# EAGLE board SunnyBuddy-Panel-v13 (EAGLE 6.6.0), part 1 of 2
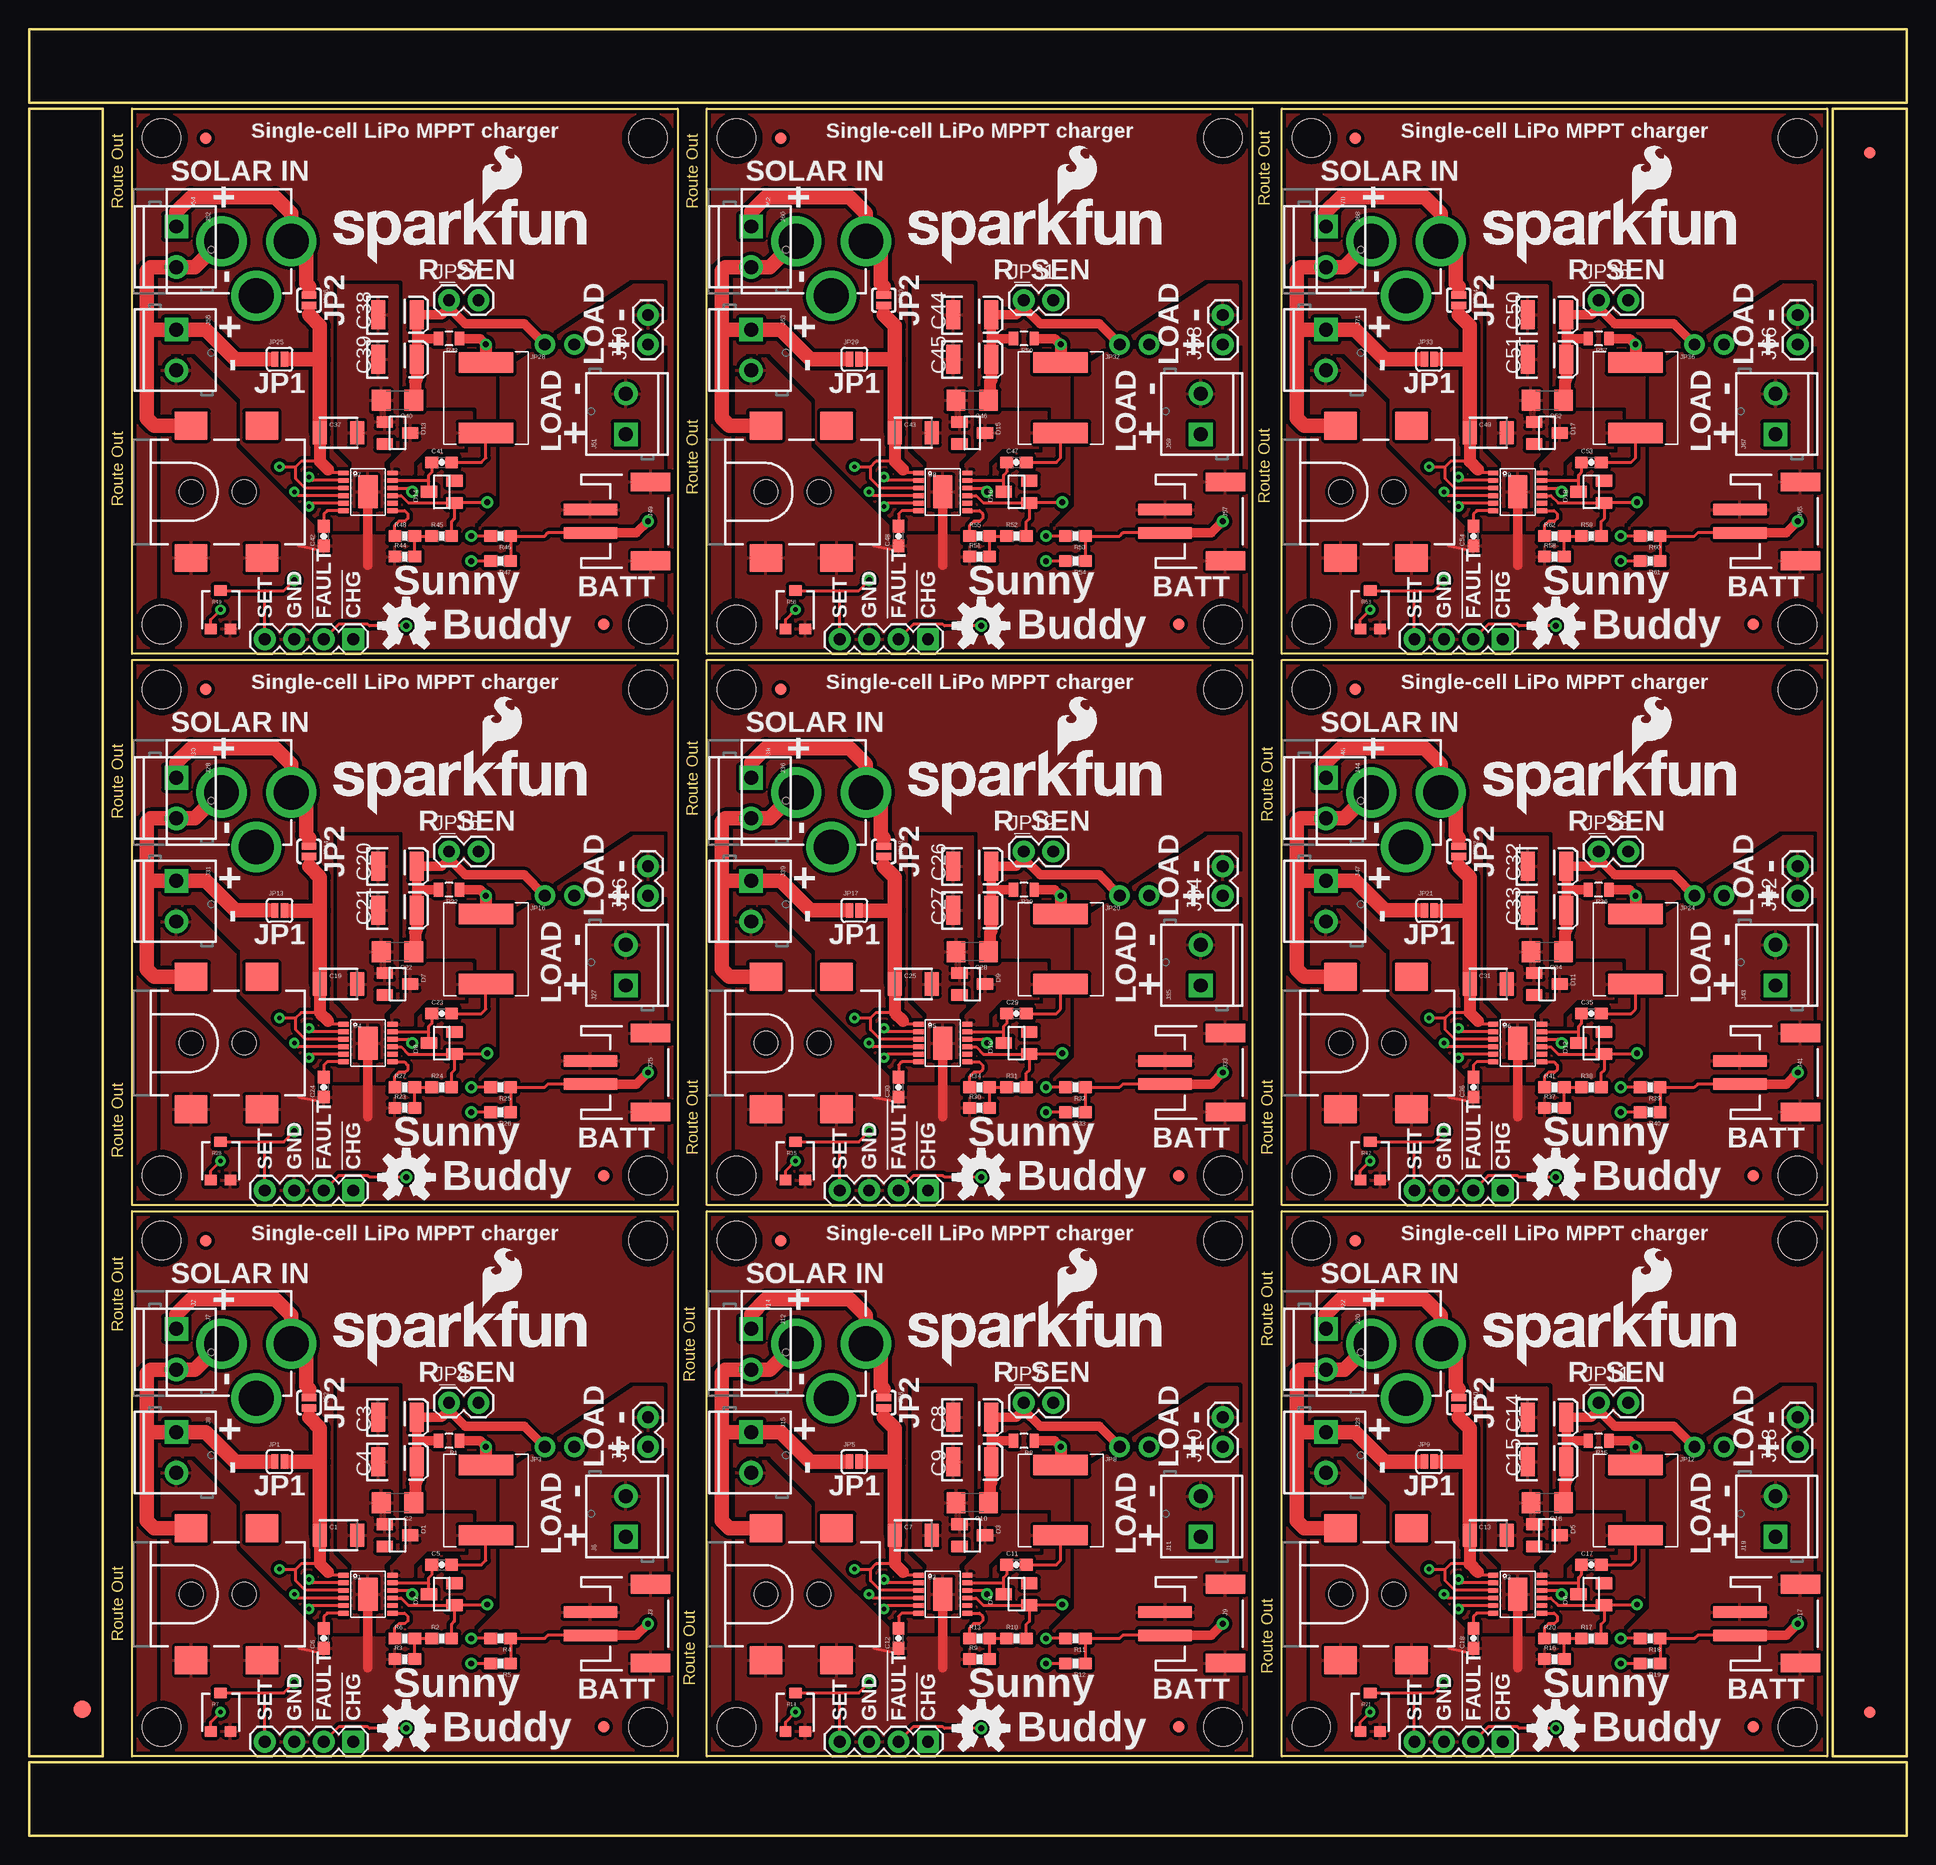
[diagram p0: board, top side]
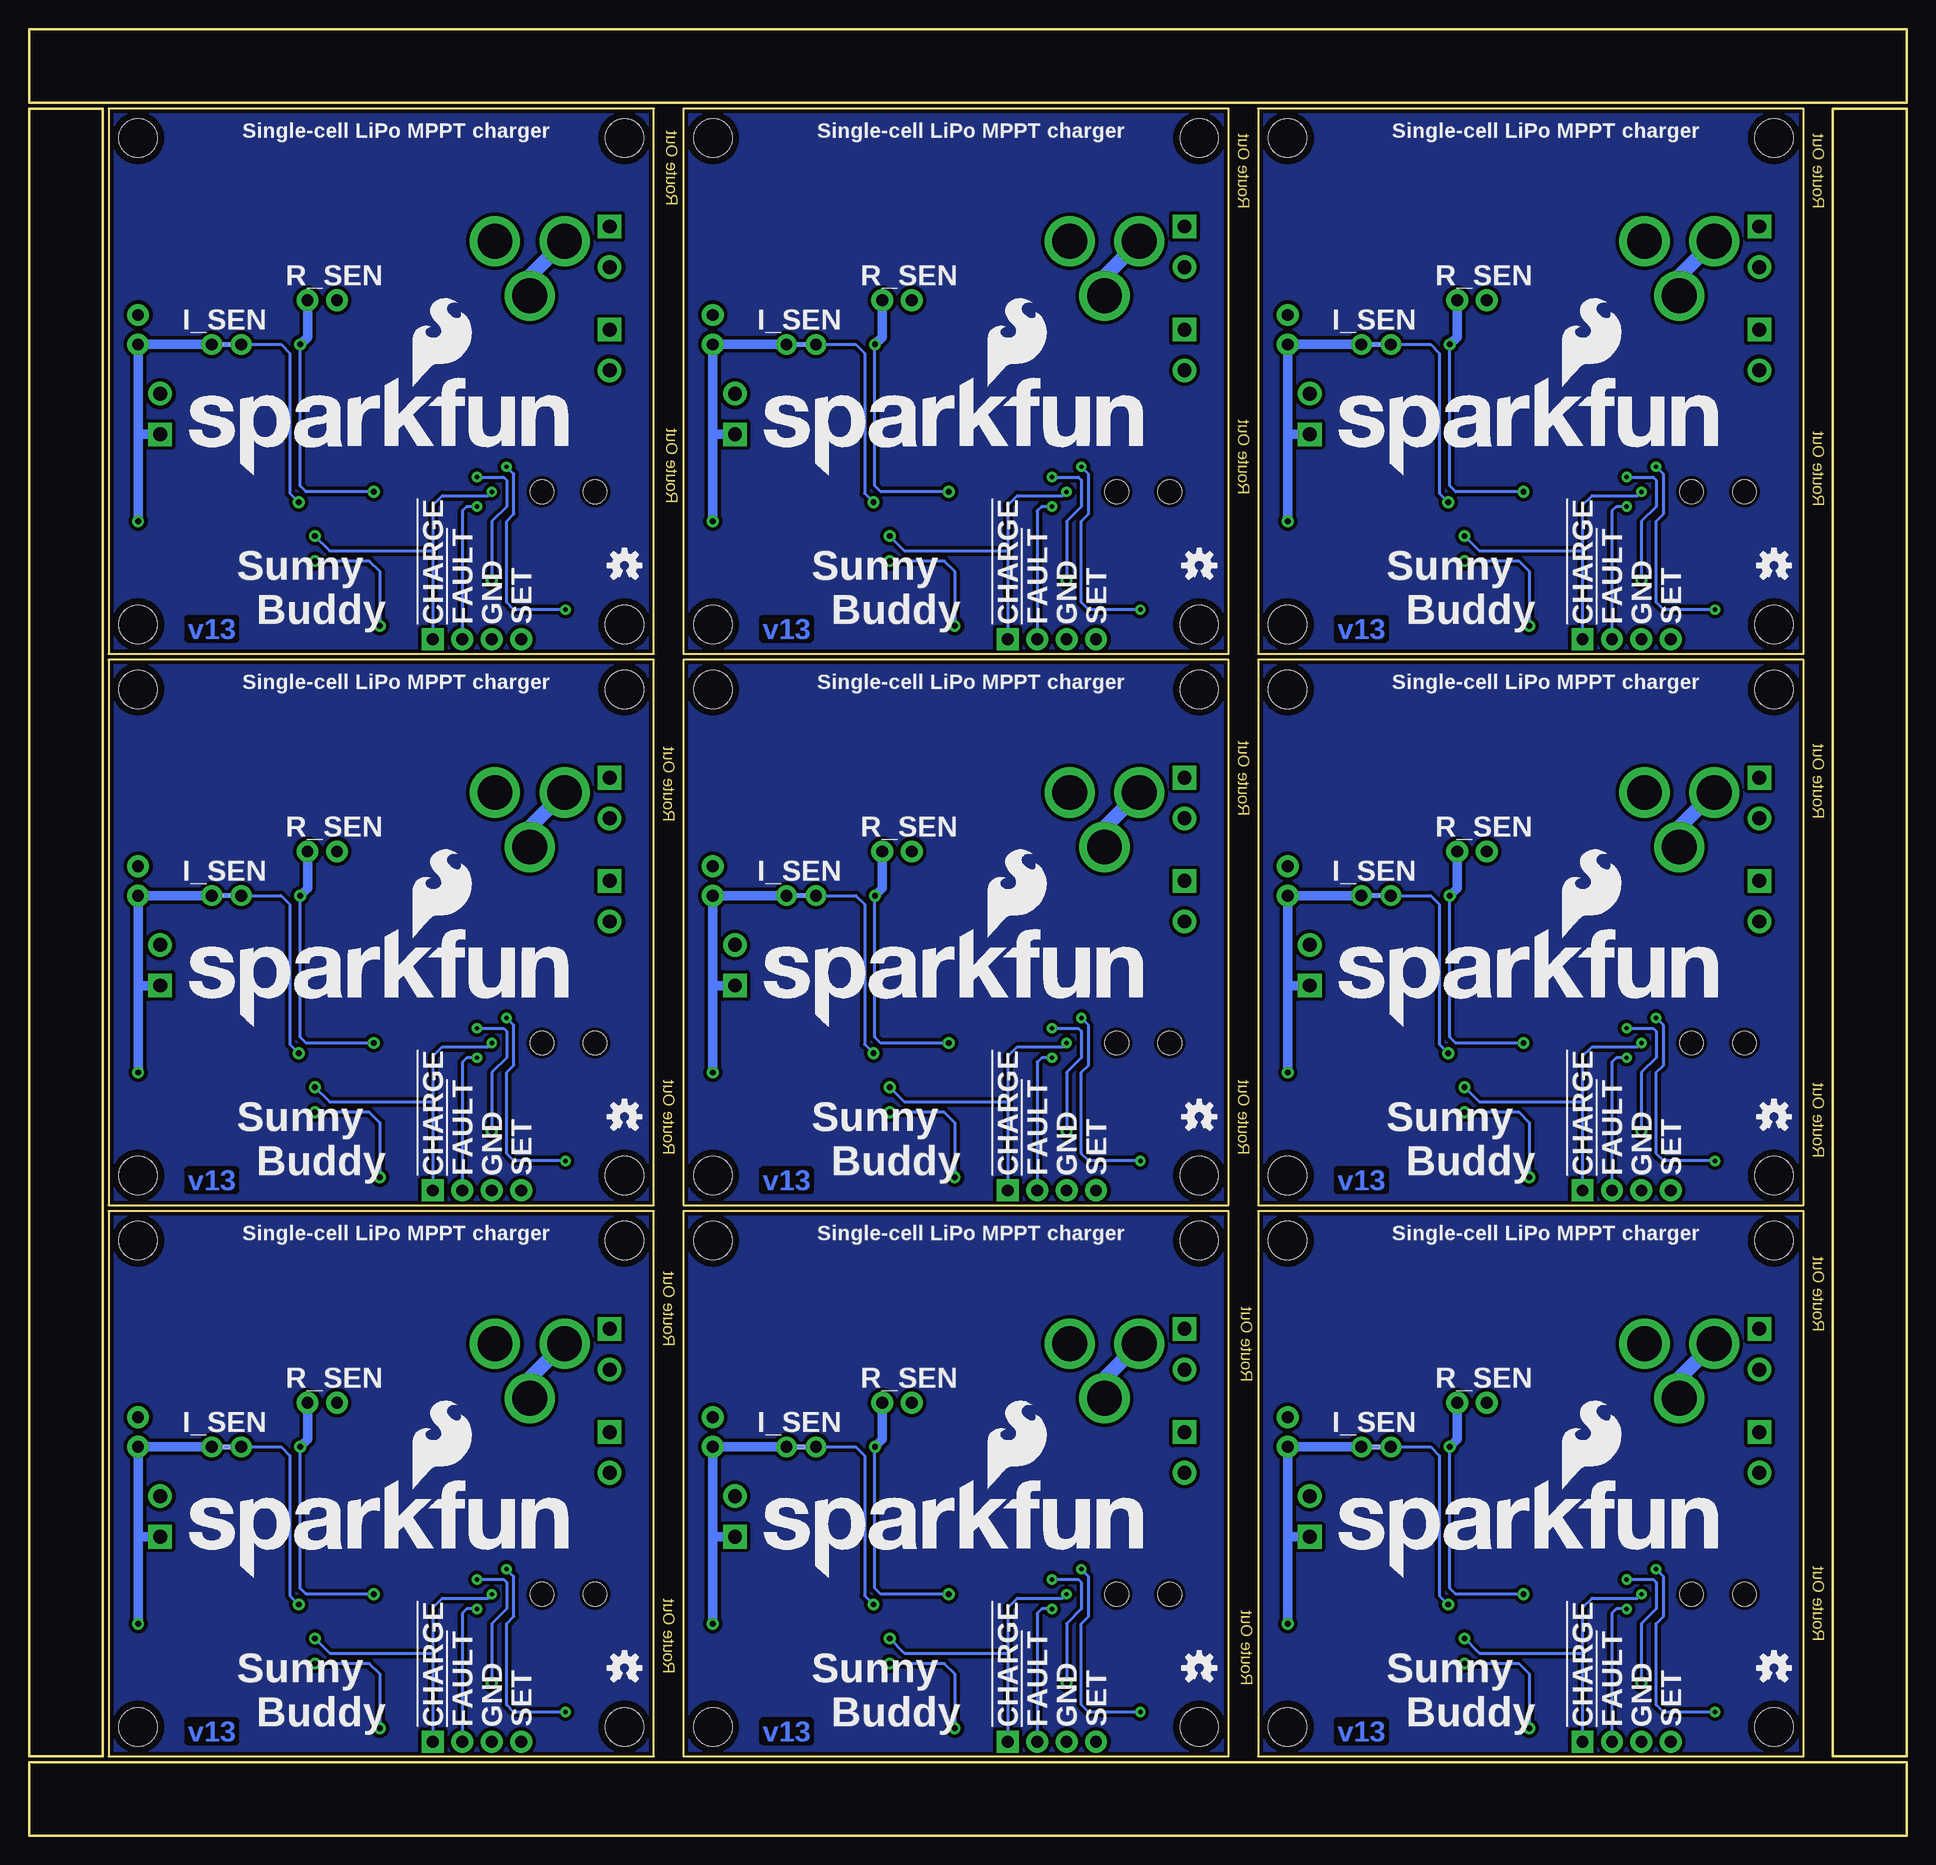
[diagram p1: board, bottom side, seen from below]

Size 161.8 x 155.7 mm. Coordinates in mm from the lower left corner, seen from the top.
Outline: 8.89,53.85 55.88,53.85 55.88,6.86 8.89,6.86 8.89,53.85
Outline: 58.42,53.85 105.41,53.85 105.41,6.86 58.42,6.86 58.42,53.85
Outline: 107.95,53.85 154.94,53.85 154.94,6.86 107.95,6.86 107.95,53.85
Outline: 8.89,101.35 55.88,101.35 55.88,54.36 8.89,54.36 8.89,101.35
Outline: 58.42,101.35 105.41,101.35 105.41,54.36 58.42,54.36 58.42,101.35
Outline: 107.95,101.35 154.94,101.35 154.94,54.36 107.95,54.36 107.95,101.35
Outline: 8.89,148.84 55.88,148.84 55.88,101.85 8.89,101.85 8.89,148.84
Outline: 58.42,148.84 105.41,148.84 105.41,101.85 58.42,101.85 58.42,148.84
Outline: 107.95,148.84 154.94,148.84 154.94,101.85 107.95,101.85 107.95,148.84
Outline: 6.35,6.86 6.35,148.84 0,148.84 0,6.86 6.35,6.86
Outline: 0,6.35 0,0 161.8,0 161.8,6.35 0,6.35
Outline: 161.8,6.86 161.8,148.84 155.45,148.84 155.45,6.86 161.8,6.86
Outline: 161.8,149.35 161.8,155.7 0,155.7 0,149.35 161.8,149.35
Copper layers (1*16): Top 0.035mm / dielectric 1.5mm / Bottom 0.035mm
Design rules "Sparkfun": minimum track width 8mil, minimum drill 20mil, track to track 8mil, track to pad 8mil, pad to pad 8mil, via to via 8mil, smd to smd 8mil, copper to edge 8mil, drill to drill 8mil, minimum pad ring 12mil, minimum via ring 10mil, stop-mask expansion 4mil, vias tented up to drill 20mil, thermal gap 10mil

## Footprints (pad centres in the part's own frame; a part is rotated, then mirrored left to right if it is on the bottom)
1210 = smd 1.2 x 2: 1 -1.6,0; 2 1.6,0
1206 = smd 1.6 x 1.8: 1 -1.4,0; 2 1.4,0
EIA3528 = smd 1.2 x 2.5: A 1.65,0; C -1.65,0
0603-CAP = smd 1.1 x 1: 1 -0.85,0; 2 0.85,0
SOT23 = smd 1 x 1.4: 1 -0.95,-1.1; 2 0.95,-1.1; 3 0,1.1
FIDUCIAL-1.5X3 = smd 1.5 x 1.5: 1 0,0
FIDUCIAL-1X2 = smd 1 x 1: 1 0,0
POWER_JACK_SMD = smd 2.8 x 2.4: GND 0,-5.7; P$4 6.1,-5.7; VIN0 0,5.7; VIN1 6.1,5.7 | hole 2.032: 0,0; 4.572,0
POWER_JACK_PTH = drill 2.997 pad 4.318: GND 0,7.7; GNDBREAK 4.7,10.7; PWR 0,13.7
JST-2-SMD = smd 1 x 4.6: 1 -1,-3.7; 2 1,-3.7 | smd 1.6 x 3.4: NC1 -3.4,1.5; NC2 3.4,1.5
1X04 = drill 1.016 pad 1.88 square: 1 0,0 | drill 1.016 pad 1.88: 2 2.54,0; 3 5.08,0; 4 7.62,0
1X02 = drill 1.016 pad 1.88: 1 0,0; 2 2.54,0
SCREWTERMINAL-3.5MM-2 = drill 1.2 pad 2.032 square: 1 0,0 | drill 1.2 pad 2.032: 2 3.5,0
SJ_2S = smd 0.635 x 1.27: 1 -0.412,0; 2 0.412,0
SJ_2S-NO = smd 0.635 x 1.27: 1 -0.45,0; 2 0.45,0
PTH-JUMPER-NC_BOTTOM_NO_SILK = drill 1.016 pad 1.778: 1 -1.27,0; 2 1.27,0 | smd 1.27 x 0.381 bottom: P$1 0,0
CR75 = smd 1.75 x 4.7: P$1 0,0; P$2 6.05,0
0805 = smd 0.8 x 1.2: 1 -0.9,0; 2 0.9,0
0603-RES = smd 1.1 x 1: 1 -0.85,0; 2 0.85,0
TRIMPOT-3MM = smd 1 x 0.9: 1 -0.85,-1.65; 3 0.85,-1.65 | smd 1.1 x 0.9: 2 0,1.65
STAND-OFF = hole 3.302: 0,0
MSOP-12_GND = smd 0.889 x 0.42: 1 -2.1,1.625; 2 -2.1,0.975; 3 -2.1,0.325; 4 -2.1,-0.325; 5 -2.1,-0.975; 6 -2.1,-1.625; 7 2.1,-1.625; 8 2.1,-0.975; 9 2.1,-0.325; 10 2.1,0.325; 11 2.1,0.975; 12 2.1,1.625 | smd 1.651 x 2.845: 13 0,0

## Placement (x,y rotation side)
C1  10uF  [1210]  26.67,25.91 0 top
C2  10uF  [1206]  31.75,28.7 180 top
C3  47uF  [EIA3528]  31.75,36.07 0 top
C4  47uF  [EIA3528]  31.75,32.26 0 top
C5  1.0uF  [0603-CAP]  35.56,23.37 0 top
C6  1.0uF  [0603-CAP]  25.4,17.02 90 top
C7  10uF  [1210]  76.2,25.91 0 top
C8  47uF  [EIA3528]  81.28,36.07 0 top
C9  47uF  [EIA3528]  81.28,32.26 0 top
C10  10uF  [1206]  81.28,28.7 180 top
C11  1.0uF  [0603-CAP]  85.09,23.37 0 top
C12  1.0uF  [0603-CAP]  74.93,17.02 90 top
C13  10uF  [1210]  125.73,25.91 0 top
C14  47uF  [EIA3528]  130.81,36.07 0 top
C15  47uF  [EIA3528]  130.81,32.26 0 top
C16  10uF  [1206]  130.81,28.7 180 top
C17  1.0uF  [0603-CAP]  134.62,23.37 0 top
C18  1.0uF  [0603-CAP]  124.46,17.02 90 top
C19  10uF  [1210]  26.67,73.41 0 top
C20  47uF  [EIA3528]  31.75,83.57 0 top
C21  47uF  [EIA3528]  31.75,79.76 0 top
C22  10uF  [1206]  31.75,76.2 180 top
C23  1.0uF  [0603-CAP]  35.56,70.87 0 top
C24  1.0uF  [0603-CAP]  25.4,64.52 90 top
C25  10uF  [1210]  76.2,73.41 0 top
C26  47uF  [EIA3528]  81.28,83.57 0 top
C27  47uF  [EIA3528]  81.28,79.76 0 top
C28  10uF  [1206]  81.28,76.2 180 top
C29  1.0uF  [0603-CAP]  85.09,70.87 0 top
C30  1.0uF  [0603-CAP]  74.93,64.52 90 top
C31  10uF  [1210]  125.73,73.41 0 top
C32  47uF  [EIA3528]  130.81,83.57 0 top
C33  47uF  [EIA3528]  130.81,79.76 0 top
C34  10uF  [1206]  130.81,76.2 180 top
C35  1.0uF  [0603-CAP]  134.62,70.87 0 top
C36  1.0uF  [0603-CAP]  124.46,64.52 90 top
C37  10uF  [1210]  26.67,120.9 0 top
C38  47uF  [EIA3528]  31.75,131.06 0 top
C39  47uF  [EIA3528]  31.75,127.25 0 top
C40  10uF  [1206]  31.75,123.7 180 top
C41  1.0uF  [0603-CAP]  35.56,118.36 0 top
C42  1.0uF  [0603-CAP]  25.4,112.01 90 top
C43  10uF  [1210]  76.2,120.9 0 top
C44  47uF  [EIA3528]  81.28,131.06 0 top
C45  47uF  [EIA3528]  81.28,127.25 0 top
C46  10uF  [1206]  81.28,123.7 180 top
C47  1.0uF  [0603-CAP]  85.09,118.36 0 top
C48  1.0uF  [0603-CAP]  74.93,112.01 90 top
C49  10uF  [1210]  125.73,120.9 0 top
C50  47uF  [EIA3528]  130.81,131.06 0 top
C51  47uF  [EIA3528]  130.81,127.25 0 top
C52  10uF  [1206]  130.81,123.7 180 top
C53  1.0uF  [0603-CAP]  134.62,118.36 0 top
C54  1.0uF  [0603-CAP]  124.46,112.01 90 top
D1  ZLLS500  [SOT23]  31.75,25.91 270 top
D2  ZLLS500  [SOT23]  35.56,20.83 90 top
D3  ZLLS500  [SOT23]  81.28,25.91 270 top
D4  ZLLS500  [SOT23]  85.09,20.83 90 top
D5  ZLLS500  [SOT23]  130.81,25.91 270 top
D6  ZLLS500  [SOT23]  134.62,20.83 90 top
D7  ZLLS500  [SOT23]  31.75,73.41 270 top
D8  ZLLS500  [SOT23]  35.56,68.33 90 top
D9  ZLLS500  [SOT23]  81.28,73.41 270 top
D10  ZLLS500  [SOT23]  85.09,68.33 90 top
D11  ZLLS500  [SOT23]  130.81,73.41 270 top
D12  ZLLS500  [SOT23]  134.62,68.33 90 top
D13  ZLLS500  [SOT23]  31.75,120.9 270 top
D14  ZLLS500  [SOT23]  35.56,115.82 90 top
D15  ZLLS500  [SOT23]  81.28,120.9 270 top
D16  ZLLS500  [SOT23]  85.09,115.82 90 top
D17  ZLLS500  [SOT23]  130.81,120.9 270 top
D18  ZLLS500  [SOT23]  134.62,115.82 90 top
E$1  [FIDUCIAL-1.5X3]  4.57,10.92 0 top
E$4  [FIDUCIAL-1X2]  158.62,10.67 0 top
E$6  [FIDUCIAL-1X2]  158.62,145.03 180 top
FID1  FIDUCIAL1X2  [FIDUCIAL-1X2]  15.24,51.31 0 top
FID2  FIDUCIAL1X2  [FIDUCIAL-1X2]  49.53,9.4 0 top
FID3  FIDUCIAL1X2  [FIDUCIAL-1X2]  64.77,51.31 0 top
FID4  FIDUCIAL1X2  [FIDUCIAL-1X2]  99.06,9.4 0 top
FID5  FIDUCIAL1X2  [FIDUCIAL-1X2]  114.3,51.31 0 top
FID6  FIDUCIAL1X2  [FIDUCIAL-1X2]  148.59,9.4 0 top
FID7  FIDUCIAL1X2  [FIDUCIAL-1X2]  15.24,98.81 0 top
FID8  FIDUCIAL1X2  [FIDUCIAL-1X2]  49.53,56.9 0 top
FID9  FIDUCIAL1X2  [FIDUCIAL-1X2]  64.77,98.81 0 top
FID10  FIDUCIAL1X2  [FIDUCIAL-1X2]  99.06,56.9 0 top
FID11  FIDUCIAL1X2  [FIDUCIAL-1X2]  114.3,98.81 0 top
FID12  FIDUCIAL1X2  [FIDUCIAL-1X2]  148.59,56.9 0 top
FID13  FIDUCIAL1X2  [FIDUCIAL-1X2]  15.24,146.3 0 top
FID14  FIDUCIAL1X2  [FIDUCIAL-1X2]  49.53,104.39 0 top
FID15  FIDUCIAL1X2  [FIDUCIAL-1X2]  64.77,146.3 0 top
FID16  FIDUCIAL1X2  [FIDUCIAL-1X2]  99.06,104.39 0 top
FID17  FIDUCIAL1X2  [FIDUCIAL-1X2]  114.3,146.3 0 top
FID18  FIDUCIAL1X2  [FIDUCIAL-1X2]  148.59,104.39 0 top
J1  5.5x2.1mm Barrel  [POWER_JACK_SMD]  13.97,20.83 0 top
J2  POWER_JACKPTH  [POWER_JACK_PTH]  8.89,42.42 270 top
J3  [JST-2-SMD]  52.07,18.29 270 top
J4  [1X04]  27.94,8.13 180 top
J5  M02PTH  [1X02]  53.34,33.53 90 top
J6  M023.5MM  [SCREWTERMINAL-3.5MM-2]  51.44,25.78 90 top
J7  M023.5MM  [SCREWTERMINAL-3.5MM-2]  12.7,43.69 270 top
J8  M023.5MM  [SCREWTERMINAL-3.5MM-2]  12.7,34.8 270 top
J9  [JST-2-SMD]  101.6,18.29 270 top
J10  M02PTH  [1X02]  102.87,33.53 90 top
J11  M023.5MM  [SCREWTERMINAL-3.5MM-2]  100.97,25.78 90 top
J12  M023.5MM  [SCREWTERMINAL-3.5MM-2]  62.23,43.69 270 top
J13  5.5x2.1mm Barrel  [POWER_JACK_SMD]  63.5,20.83 0 top
J14  POWER_JACKPTH  [POWER_JACK_PTH]  58.42,42.42 270 top
J15  M023.5MM  [SCREWTERMINAL-3.5MM-2]  62.23,34.8 270 top
J16  [1X04]  77.47,8.13 180 top
J17  [JST-2-SMD]  151.13,18.29 270 top
J18  M02PTH  [1X02]  152.4,33.53 90 top
J19  M023.5MM  [SCREWTERMINAL-3.5MM-2]  150.5,25.78 90 top
J20  M023.5MM  [SCREWTERMINAL-3.5MM-2]  111.76,43.69 270 top
J21  5.5x2.1mm Barrel  [POWER_JACK_SMD]  113.03,20.83 0 top
J22  POWER_JACKPTH  [POWER_JACK_PTH]  107.95,42.42 270 top
J23  M023.5MM  [SCREWTERMINAL-3.5MM-2]  111.76,34.8 270 top
J24  [1X04]  127,8.13 180 top
J25  [JST-2-SMD]  52.07,65.79 270 top
J26  M02PTH  [1X02]  53.34,81.03 90 top
J27  M023.5MM  [SCREWTERMINAL-3.5MM-2]  51.44,73.28 90 top
J28  M023.5MM  [SCREWTERMINAL-3.5MM-2]  12.7,91.19 270 top
J29  5.5x2.1mm Barrel  [POWER_JACK_SMD]  13.97,68.33 0 top
J30  POWER_JACKPTH  [POWER_JACK_PTH]  8.89,89.92 270 top
J31  M023.5MM  [SCREWTERMINAL-3.5MM-2]  12.7,82.3 270 top
J32  [1X04]  27.94,55.63 180 top
J33  [JST-2-SMD]  101.6,65.79 270 top
J34  M02PTH  [1X02]  102.87,81.03 90 top
J35  M023.5MM  [SCREWTERMINAL-3.5MM-2]  100.97,73.28 90 top
J36  M023.5MM  [SCREWTERMINAL-3.5MM-2]  62.23,91.19 270 top
J37  5.5x2.1mm Barrel  [POWER_JACK_SMD]  63.5,68.33 0 top
J38  POWER_JACKPTH  [POWER_JACK_PTH]  58.42,89.92 270 top
J39  M023.5MM  [SCREWTERMINAL-3.5MM-2]  62.23,82.3 270 top
J40  [1X04]  77.47,55.63 180 top
J41  [JST-2-SMD]  151.13,65.79 270 top
J42  M02PTH  [1X02]  152.4,81.03 90 top
J43  M023.5MM  [SCREWTERMINAL-3.5MM-2]  150.5,73.28 90 top
J44  M023.5MM  [SCREWTERMINAL-3.5MM-2]  111.76,91.19 270 top
J45  5.5x2.1mm Barrel  [POWER_JACK_SMD]  113.03,68.33 0 top
J46  POWER_JACKPTH  [POWER_JACK_PTH]  107.95,89.92 270 top
J47  M023.5MM  [SCREWTERMINAL-3.5MM-2]  111.76,82.3 270 top
J48  [1X04]  127,55.63 180 top
J49  [JST-2-SMD]  52.07,113.28 270 top
J50  M02PTH  [1X02]  53.34,128.52 90 top
J51  M023.5MM  [SCREWTERMINAL-3.5MM-2]  51.44,120.78 90 top
J52  M023.5MM  [SCREWTERMINAL-3.5MM-2]  12.7,138.68 270 top
J53  5.5x2.1mm Barrel  [POWER_JACK_SMD]  13.97,115.82 0 top
J54  POWER_JACKPTH  [POWER_JACK_PTH]  8.89,137.41 270 top
J55  M023.5MM  [SCREWTERMINAL-3.5MM-2]  12.7,129.79 270 top
J56  [1X04]  27.94,103.12 180 top
J57  [JST-2-SMD]  101.6,113.28 270 top
J58  M02PTH  [1X02]  102.87,128.52 90 top
J59  M023.5MM  [SCREWTERMINAL-3.5MM-2]  100.97,120.78 90 top
J60  M023.5MM  [SCREWTERMINAL-3.5MM-2]  62.23,138.68 270 top
J61  5.5x2.1mm Barrel  [POWER_JACK_SMD]  63.5,115.82 0 top
J62  POWER_JACKPTH  [POWER_JACK_PTH]  58.42,137.41 270 top
J63  M023.5MM  [SCREWTERMINAL-3.5MM-2]  62.23,129.79 270 top
J64  [1X04]  77.47,103.12 180 top
J65  [JST-2-SMD]  151.13,113.28 270 top
J66  M02PTH  [1X02]  152.4,128.52 90 top
J67  M023.5MM  [SCREWTERMINAL-3.5MM-2]  150.5,120.78 90 top
J68  M023.5MM  [SCREWTERMINAL-3.5MM-2]  111.76,138.68 270 top
J69  5.5x2.1mm Barrel  [POWER_JACK_SMD]  113.03,115.82 0 top
J70  POWER_JACKPTH  [POWER_JACK_PTH]  107.95,137.41 270 top
J71  M023.5MM  [SCREWTERMINAL-3.5MM-2]  111.76,129.79 270 top
J72  [1X04]  127,103.12 180 top
JP1  [SJ_2S]  21.59,32.26 0 top
JP2  [SJ_2S-NO]  24.13,37.34 270 top
JP3  JUMPER-PTH-2-NC  [PTH-JUMPER-NC_BOTTOM_NO_SILK]  45.72,33.53 0 top
JP4  R_SEN  [1X02]  36.2,37.34 0 top
JP5  [SJ_2S]  71.12,32.26 0 top
JP6  [SJ_2S-NO]  73.66,37.34 270 top
JP7  R_SEN  [1X02]  85.72,37.34 0 top
JP8  JUMPER-PTH-2-NC  [PTH-JUMPER-NC_BOTTOM_NO_SILK]  95.25,33.53 0 top
JP9  [SJ_2S]  120.65,32.26 0 top
JP10  [SJ_2S-NO]  123.19,37.34 270 top
JP11  R_SEN  [1X02]  135.25,37.34 0 top
JP12  JUMPER-PTH-2-NC  [PTH-JUMPER-NC_BOTTOM_NO_SILK]  144.78,33.53 0 top
JP13  [SJ_2S]  21.59,79.76 0 top
JP14  [SJ_2S-NO]  24.13,84.84 270 top
JP15  R_SEN  [1X02]  36.2,84.84 0 top
JP16  JUMPER-PTH-2-NC  [PTH-JUMPER-NC_BOTTOM_NO_SILK]  45.72,81.03 0 top
JP17  [SJ_2S]  71.12,79.76 0 top
JP18  [SJ_2S-NO]  73.66,84.84 270 top
JP19  R_SEN  [1X02]  85.72,84.84 0 top
JP20  JUMPER-PTH-2-NC  [PTH-JUMPER-NC_BOTTOM_NO_SILK]  95.25,81.03 0 top
JP21  [SJ_2S]  120.65,79.76 0 top
JP22  [SJ_2S-NO]  123.19,84.84 270 top
JP23  R_SEN  [1X02]  135.25,84.84 0 top
JP24  JUMPER-PTH-2-NC  [PTH-JUMPER-NC_BOTTOM_NO_SILK]  144.78,81.03 0 top
JP25  [SJ_2S]  21.59,127.25 0 top
JP26  [SJ_2S-NO]  24.13,132.33 270 top
JP27  R_SEN  [1X02]  36.2,132.33 0 top
JP28  JUMPER-PTH-2-NC  [PTH-JUMPER-NC_BOTTOM_NO_SILK]  45.72,128.52 0 top
JP29  [SJ_2S]  71.12,127.25 0 top
JP30  [SJ_2S-NO]  73.66,132.33 270 top
JP31  R_SEN  [1X02]  85.72,132.33 0 top
JP32  JUMPER-PTH-2-NC  [PTH-JUMPER-NC_BOTTOM_NO_SILK]  95.25,128.52 0 top
JP33  [SJ_2S]  120.65,127.25 0 top
JP34  [SJ_2S-NO]  123.19,132.33 270 top
JP35  R_SEN  [1X02]  135.25,132.33 0 top
JP36  JUMPER-PTH-2-NC  [PTH-JUMPER-NC_BOTTOM_NO_SILK]  144.78,128.52 0 top
L1  68uH  [CR75]  39.37,25.91 90 top
L2  68uH  [CR75]  88.9,25.91 90 top
L3  68uH  [CR75]  138.43,25.91 90 top
L4  68uH  [CR75]  39.37,73.41 90 top
L5  68uH  [CR75]  88.9,73.41 90 top
L6  68uH  [CR75]  138.43,73.41 90 top
L7  68uH  [CR75]  39.37,120.9 90 top
L8  68uH  [CR75]  88.9,120.9 90 top
L9  68uH  [CR75]  138.43,120.9 90 top
LOGO1  SFE_LOGO_NAME_FLAME.2_INCH  [SFE_LOGO_NAME_FLAME_.2]  25.53,40.39 0 top
LOGO2  OSHW-LOGOM  [OSHW-LOGO-M]  32.51,9.27 0 top
LOGO3  OSHW-LOGOS  [OSHW-LOGO-S]  11.43,14.48 0 bottom
LOGO4  SFE_LOGO_NAME_FLAME.3_INCH  [SFE_LOGO_NAME_FLAME_.3]  49.53,22.1 0 bottom
LOGO5  SFE_LOGO_NAME_FLAME.2_INCH  [SFE_LOGO_NAME_FLAME_.2]  75.06,40.39 0 top
LOGO6  OSHW-LOGOM  [OSHW-LOGO-M]  82.04,9.27 0 top
LOGO7  OSHW-LOGOS  [OSHW-LOGO-S]  60.96,14.48 0 bottom
LOGO8  SFE_LOGO_NAME_FLAME.3_INCH  [SFE_LOGO_NAME_FLAME_.3]  99.06,22.1 0 bottom
LOGO9  SFE_LOGO_NAME_FLAME.2_INCH  [SFE_LOGO_NAME_FLAME_.2]  124.59,40.39 0 top
LOGO10  OSHW-LOGOM  [OSHW-LOGO-M]  131.57,9.27 0 top
LOGO11  OSHW-LOGOS  [OSHW-LOGO-S]  110.49,14.48 0 bottom
LOGO12  SFE_LOGO_NAME_FLAME.3_INCH  [SFE_LOGO_NAME_FLAME_.3]  148.59,22.1 0 bottom
LOGO13  SFE_LOGO_NAME_FLAME.2_INCH  [SFE_LOGO_NAME_FLAME_.2]  25.53,87.88 0 top
LOGO14  OSHW-LOGOM  [OSHW-LOGO-M]  32.51,56.77 0 top
LOGO15  OSHW-LOGOS  [OSHW-LOGO-S]  11.43,61.98 0 bottom
LOGO16  SFE_LOGO_NAME_FLAME.3_INCH  [SFE_LOGO_NAME_FLAME_.3]  49.53,69.6 0 bottom
LOGO17  SFE_LOGO_NAME_FLAME.2_INCH  [SFE_LOGO_NAME_FLAME_.2]  75.06,87.88 0 top
LOGO18  OSHW-LOGOM  [OSHW-LOGO-M]  82.04,56.77 0 top
LOGO19  OSHW-LOGOS  [OSHW-LOGO-S]  60.96,61.98 0 bottom
LOGO20  SFE_LOGO_NAME_FLAME.3_INCH  [SFE_LOGO_NAME_FLAME_.3]  99.06,69.6 0 bottom
LOGO21  SFE_LOGO_NAME_FLAME.2_INCH  [SFE_LOGO_NAME_FLAME_.2]  124.59,87.88 0 top
LOGO22  OSHW-LOGOM  [OSHW-LOGO-M]  131.57,56.77 0 top
LOGO23  OSHW-LOGOS  [OSHW-LOGO-S]  110.49,61.98 0 bottom
LOGO24  SFE_LOGO_NAME_FLAME.3_INCH  [SFE_LOGO_NAME_FLAME_.3]  148.59,69.6 0 bottom
LOGO25  SFE_LOGO_NAME_FLAME.2_INCH  [SFE_LOGO_NAME_FLAME_.2]  25.53,135.38 0 top
LOGO26  OSHW-LOGOM  [OSHW-LOGO-M]  32.51,104.27 0 top
LOGO27  OSHW-LOGOS  [OSHW-LOGO-S]  11.43,109.47 0 bottom
LOGO28  SFE_LOGO_NAME_FLAME.3_INCH  [SFE_LOGO_NAME_FLAME_.3]  49.53,117.09 0 bottom
LOGO29  SFE_LOGO_NAME_FLAME.2_INCH  [SFE_LOGO_NAME_FLAME_.2]  75.06,135.38 0 top
LOGO30  OSHW-LOGOM  [OSHW-LOGO-M]  82.04,104.27 0 top
LOGO31  OSHW-LOGOS  [OSHW-LOGO-S]  60.96,109.47 0 bottom
LOGO32  SFE_LOGO_NAME_FLAME.3_INCH  [SFE_LOGO_NAME_FLAME_.3]  99.06,117.09 0 bottom
LOGO33  SFE_LOGO_NAME_FLAME.2_INCH  [SFE_LOGO_NAME_FLAME_.2]  124.59,135.38 0 top
LOGO34  OSHW-LOGOM  [OSHW-LOGO-M]  131.57,104.27 0 top
LOGO35  OSHW-LOGOS  [OSHW-LOGO-S]  110.49,109.47 0 bottom
LOGO36  SFE_LOGO_NAME_FLAME.3_INCH  [SFE_LOGO_NAME_FLAME_.3]  148.59,117.09 0 bottom
R1  0.22  [0805]  36.2,34.04 180 top
R2  47k  [0603-RES]  35.56,17.02 0 top
R3  220k  [0603-RES]  32.38,15.24 0 top
R4  10K  [0603-RES]  40.64,17.02 180 top
R5  10K  [0603-RES]  40.64,14.86 180 top
R6  220k  [0603-RES]  32.38,17.02 0 top
R7  10k  [TRIMPOT-3MM]  16.51,10.67 0 top
R8  0.22  [0805]  85.72,34.04 180 top
R9  220k  [0603-RES]  81.92,15.24 0 top
R10  47k  [0603-RES]  85.09,17.02 0 top
R11  10K  [0603-RES]  90.17,17.02 180 top
R12  10K  [0603-RES]  90.17,14.86 180 top
R13  220k  [0603-RES]  81.92,17.02 0 top
R14  10k  [TRIMPOT-3MM]  66.04,10.67 0 top
R15  0.22  [0805]  135.25,34.04 180 top
R16  220k  [0603-RES]  131.44,15.24 0 top
R17  47k  [0603-RES]  134.62,17.02 0 top
R18  10K  [0603-RES]  139.7,17.02 180 top
R19  10K  [0603-RES]  139.7,14.86 180 top
R20  220k  [0603-RES]  131.44,17.02 0 top
R21  10k  [TRIMPOT-3MM]  115.57,10.67 0 top
R22  0.22  [0805]  36.2,81.53 180 top
R23  220k  [0603-RES]  32.38,62.74 0 top
R24  47k  [0603-RES]  35.56,64.52 0 top
R25  10K  [0603-RES]  40.64,64.52 180 top
R26  10K  [0603-RES]  40.64,62.36 180 top
R27  220k  [0603-RES]  32.38,64.52 0 top
R28  10k  [TRIMPOT-3MM]  16.51,58.17 0 top
R29  0.22  [0805]  85.72,81.53 180 top
R30  220k  [0603-RES]  81.92,62.74 0 top
R31  47k  [0603-RES]  85.09,64.52 0 top
R32  10K  [0603-RES]  90.17,64.52 180 top
R33  10K  [0603-RES]  90.17,62.36 180 top
R34  220k  [0603-RES]  81.92,64.52 0 top
R35  10k  [TRIMPOT-3MM]  66.04,58.17 0 top
R36  0.22  [0805]  135.25,81.53 180 top
R37  220k  [0603-RES]  131.44,62.74 0 top
R38  47k  [0603-RES]  134.62,64.52 0 top
R39  10K  [0603-RES]  139.7,64.52 180 top
R40  10K  [0603-RES]  139.7,62.36 180 top
R41  220k  [0603-RES]  131.44,64.52 0 top
R42  10k  [TRIMPOT-3MM]  115.57,58.17 0 top
R43  0.22  [0805]  36.2,129.03 180 top
R44  220k  [0603-RES]  32.38,110.24 0 top
R45  47k  [0603-RES]  35.56,112.01 0 top
R46  10K  [0603-RES]  40.64,112.01 180 top
R47  10K  [0603-RES]  40.64,109.86 180 top
R48  220k  [0603-RES]  32.38,112.01 0 top
R49  10k  [TRIMPOT-3MM]  16.51,105.66 0 top
R50  0.22  [0805]  85.72,129.03 180 top
R51  220k  [0603-RES]  81.92,110.24 0 top
R52  47k  [0603-RES]  85.09,112.01 0 top
R53  10K  [0603-RES]  90.17,112.01 180 top
R54  10K  [0603-RES]  90.17,109.86 180 top
R55  220k  [0603-RES]  81.92,112.01 0 top
R56  10k  [TRIMPOT-3MM]  66.04,105.66 0 top
R57  0.22  [0805]  135.25,129.03 180 top
R58  220k  [0603-RES]  131.44,110.24 0 top
R59  47k  [0603-RES]  134.62,112.01 0 top
R60  10K  [0603-RES]  139.7,112.01 180 top
R61  10K  [0603-RES]  139.7,109.86 180 top
R62  220k  [0603-RES]  131.44,112.01 0 top
R63  10k  [TRIMPOT-3MM]  115.57,105.66 0 top
STANDOFF1  STAND-OFF  [STAND-OFF]  11.43,9.4 0 top
STANDOFF2  STAND-OFF  [STAND-OFF]  11.43,51.31 0 top
STANDOFF3  STAND-OFF  [STAND-OFF]  53.34,51.31 0 top
STANDOFF4  STAND-OFF  [STAND-OFF]  53.34,9.4 0 top
STANDOFF5  STAND-OFF  [STAND-OFF]  60.96,9.4 0 top
STANDOFF6  STAND-OFF  [STAND-OFF]  60.96,51.31 0 top
STANDOFF7  STAND-OFF  [STAND-OFF]  102.87,51.31 0 top
STANDOFF8  STAND-OFF  [STAND-OFF]  102.87,9.4 0 top
STANDOFF9  STAND-OFF  [STAND-OFF]  110.49,9.4 0 top
STANDOFF10  STAND-OFF  [STAND-OFF]  110.49,51.31 0 top
STANDOFF11  STAND-OFF  [STAND-OFF]  152.4,51.31 0 top
STANDOFF12  STAND-OFF  [STAND-OFF]  152.4,9.4 0 top
STANDOFF13  STAND-OFF  [STAND-OFF]  11.43,56.9 0 top
STANDOFF14  STAND-OFF  [STAND-OFF]  11.43,98.81 0 top
STANDOFF15  STAND-OFF  [STAND-OFF]  53.34,98.81 0 top
STANDOFF16  STAND-OFF  [STAND-OFF]  53.34,56.9 0 top
STANDOFF17  STAND-OFF  [STAND-OFF]  60.96,56.9 0 top
STANDOFF18  STAND-OFF  [STAND-OFF]  60.96,98.81 0 top
STANDOFF19  STAND-OFF  [STAND-OFF]  102.87,98.81 0 top
STANDOFF20  STAND-OFF  [STAND-OFF]  102.87,56.9 0 top
STANDOFF21  STAND-OFF  [STAND-OFF]  110.49,56.9 0 top
STANDOFF22  STAND-OFF  [STAND-OFF]  110.49,98.81 0 top
STANDOFF23  STAND-OFF  [STAND-OFF]  152.4,98.81 0 top
STANDOFF24  STAND-OFF  [STAND-OFF]  152.4,56.9 0 top
STANDOFF25  STAND-OFF  [STAND-OFF]  11.43,104.39 0 top
STANDOFF26  STAND-OFF  [STAND-OFF]  11.43,146.3 0 top
STANDOFF27  STAND-OFF  [STAND-OFF]  53.34,146.3 0 top
STANDOFF28  STAND-OFF  [STAND-OFF]  53.34,104.39 0 top
STANDOFF29  STAND-OFF  [STAND-OFF]  60.96,104.39 0 top
STANDOFF30  STAND-OFF  [STAND-OFF]  60.96,146.3 0 top
STANDOFF31  STAND-OFF  [STAND-OFF]  102.87,146.3 0 top
STANDOFF32  STAND-OFF  [STAND-OFF]  102.87,104.39 0 top
STANDOFF33  STAND-OFF  [STAND-OFF]  110.49,104.39 0 top
STANDOFF34  STAND-OFF  [STAND-OFF]  110.49,146.3 0 top
STANDOFF35  STAND-OFF  [STAND-OFF]  152.4,146.3 0 top
STANDOFF36  STAND-OFF  [STAND-OFF]  152.4,104.39 0 top
U1  LT3652  [MSOP-12_GND]  29.21,20.83 0 top
U2  LT3652  [MSOP-12_GND]  78.74,20.83 0 top
U3  LT3652  [MSOP-12_GND]  128.27,20.83 0 top
U4  LT3652  [MSOP-12_GND]  29.21,68.33 0 top
U5  LT3652  [MSOP-12_GND]  78.74,68.33 0 top
U6  LT3652  [MSOP-12_GND]  128.27,68.33 0 top
U7  LT3652  [MSOP-12_GND]  29.21,115.82 0 top
U8  LT3652  [MSOP-12_GND]  78.74,115.82 0 top
U9  LT3652  [MSOP-12_GND]  128.27,115.82 0 top

## Library data of the parts
C1 C7 C13 C19 C25 C31 C37 C43 C49 = SparkFun-Capacitors; PROD_ID: CAP-09824
C2 C10 C16 C22 C28 C34 C40 C46 C52 = SparkFun-Capacitors; PROD_ID: CAP-10057
C3 C4 C8 C9 C14 C15 C20 C21 C26 C27 C32 C33 C38 C39 C44 C45 C50 C51 = SparkFun-Capacitors; PROD_ID: CAP-08310
C5 C6 C11 C12 C17 C18 C23 C24 C29 C30 C35 C36 C41 C42 C47 C48 C53 C54 = SparkFun-Capacitors; PROD_ID: CAP-00868
D1-D18 = SparkFun-DiscreteSemi; PROD_ID: DIO-08411
E$1 = SparkFun-Retired
E$4 E$6 FID1-FID18 LOGO1-LOGO36 = SparkFun-Aesthetics
J1 J13 J21 J29 J37 J45 J53 J61 J69 = SparkFun-Connectors; PROD_ID: CONN-08106
J2 J4-J8 J10-J12 J14-J16 J18-J20 J22-J24 J26-J28 J30-J32 J34-J36 J38-J40 J42-J44 J46-J48 J50-J52 J54-J56 J58-J60 J62-J64 J66-J68 J70-J72 JP4 JP7 JP11 JP15 JP19 JP23 JP27 JP31 JP35 = SparkFun-Connectors
J3 J9 J17 J25 J33 J41 J49 J57 J65 = SparkFun-Connectors; PROD_ID: CONN-08352
JP1-JP3 JP5 JP6 JP8-JP10 JP12-JP14 JP16-JP18 JP20-JP22 JP24-JP26 JP28-JP30 JP32-JP34 JP36 = SparkFun-Passives
L1-L9 = SparkFun-Passives; PROD_ID: NDUC-09739
R1 R8 R15 R22 R29 R36 R43 R50 R57 = SparkFun-Resistors; PROD_ID: RES-09883
R2 R10 R17 R24 R31 R38 R45 R52 R59 = SparkFun-Resistors; PROD_ID: RES-07871
R3 R6 R9 R13 R16 R20 R23 R27 R30 R34 R37 R41 R44 R48 R51 R55 R58 R62 = SparkFun-Resistors; PROD_ID: RES-08969
R4 R5 R11 R12 R18 R19 R25 R26 R32 R33 R39 R40 R46 R47 R53 R54 R60 R61 = SparkFun-Resistors; PROD_ID: RES-00824
R7 R14 R21 R28 R35 R42 R49 R56 R63 = SparkFun-Electromechanical; PROD_ID: RES-09285
STANDOFF1-STANDOFF36 = SparkFun-Electromechanical
U1-U9 = SparkFun-PowerIC

## Nets
!CHRG: J4.1 R4.2 U1.4
!CHRG1: J16.1 R11.2 U2.4
!CHRG2: J24.1 R18.2 U3.4
!CHRG3: J32.1 R25.2 U4.4
!CHRG4: J40.1 R32.2 U5.4
!CHRG5: J48.1 R39.2 U6.4
!CHRG6: J56.1 R46.2 U7.4
!CHRG7: J64.1 R53.2 U8.4
!CHRG8: J72.1 R60.2 U9.4
!FAULT: J4.2 R5.2 U1.5
!FAULT1: J16.2 R12.2 U2.5
!FAULT2: J24.2 R19.2 U3.5
!FAULT3: J32.2 R26.2 U4.5
!FAULT4: J40.2 R33.2 U5.5
!FAULT5: J48.2 R40.2 U6.5
!FAULT6: J56.2 R47.2 U7.5
!FAULT7: J64.2 R54.2 U8.5
!FAULT8: J72.2 R61.2 U9.5
BOOST: C5.1 D2.3 U1.11
BOOST1: C11.1 D4.3 U2.11
BOOST2: C17.1 D6.3 U3.11
BOOST3: C23.1 D8.3 U4.11
BOOST4: C29.1 D10.3 U5.11
BOOST5: C35.1 D12.3 U6.11
BOOST6: C41.1 D14.3 U7.11
BOOST7: C47.1 D16.3 U8.11
BOOST8: C53.1 D18.3 U9.11
FB: R2.1 R3.2 R6.2
FB1: R9.2 R10.1 R13.2
FB2: R16.2 R17.1 R20.2
FB3: R23.2 R24.1 R27.2
FB4: R30.2 R31.1 R34.2
FB5: R37.2 R38.1 R41.2
FB6: R44.2 R45.1 R48.2
FB7: R51.2 R52.1 R55.2
FB8: R58.2 R59.1 R62.2
GND: C1.2 C2.2 C3.C C4.C C6.1 D1.1 J1.GND J1.P$4 J3.1 J3.NC1 J3.NC2 J4.3 J5.2 J6.2 J8.2 R3.1 R7.3 U1.13
GND1: C7.2 C8.C C9.C C10.2 C12.1 D3.1 J9.1 J9.NC1 J9.NC2 J10.2 J11.2 J13.GND J13.P$4 J15.2 J16.3 R9.1 R14.3 U2.13
GND2: C13.2 C14.C C15.C C16.2 C18.1 D5.1 J17.1 J17.NC1 J17.NC2 J18.2 J19.2 J21.GND J21.P$4 J23.2 J24.3 R16.1 R21.3 U3.13
GND3: C19.2 C20.C C21.C C22.2 C24.1 D7.1 J25.1 J25.NC1 J25.NC2 J26.2 J27.2 J29.GND J29.P$4 J31.2 J32.3 R23.1 R28.3 U4.13
GND4: C25.2 C26.C C27.C C28.2 C30.1 D9.1 J33.1 J33.NC1 J33.NC2 J34.2 J35.2 J37.GND J37.P$4 J39.2 J40.3 R30.1 R35.3 U5.13
GND5: C31.2 C32.C C33.C C34.2 C36.1 D11.1 J41.1 J41.NC1 J41.NC2 J42.2 J43.2 J45.GND J45.P$4 J47.2 J48.3 R37.1 R42.3 U6.13
GND6: C37.2 C38.C C39.C C40.2 C42.1 D13.1 J49.1 J49.NC1 J49.NC2 J50.2 J51.2 J53.GND J53.P$4 J55.2 J56.3 R44.1 R49.3 U7.13
GND7: C43.2 C44.C C45.C C46.2 C48.1 D15.1 J57.1 J57.NC1 J57.NC2 J58.2 J59.2 J61.GND J61.P$4 J63.2 J64.3 R51.1 R56.3 U8.13
GND8: C49.2 C50.C C51.C C52.2 C54.1 D17.1 J65.1 J65.NC1 J65.NC2 J66.2 J67.2 J69.GND J69.P$4 J71.2 J72.3 R58.1 R63.3 U9.13
N$3: R6.1 U1.7
N$4: C2.1 C3.A C4.A D2.1 JP3.1 JP4.1 R1.2 R2.2 U1.9
N$5: J12.2 J13.VIN0 J14.GND J14.GNDBREAK J15.1 JP5.1
N$8: J1.VIN0 J2.GND J2.GNDBREAK J7.2 J8.1 JP1.1
N$9: R13.1 U2.7
N$10: C8.A C9.A C10.1 D4.1 JP7.1 JP8.1 R8.2 R10.2 U2.9
N$11: J20.2 J21.VIN0 J22.GND J22.GNDBREAK J23.1 JP9.1
N$14: R20.1 U3.7
N$15: C14.A C15.A C16.1 D6.1 JP11.1 JP12.1 R15.2 R17.2 U3.9
N$16: J28.2 J29.VIN0 J30.GND J30.GNDBREAK J31.1 JP13.1
N$19: R27.1 U4.7
N$20: C20.A C21.A C22.1 D8.1 JP15.1 JP16.1 R22.2 R24.2 U4.9
N$21: J36.2 J37.VIN0 J38.GND J38.GNDBREAK J39.1 JP17.1
N$24: R34.1 U5.7
N$25: C26.A C27.A C28.1 D10.1 JP19.1 JP20.1 R29.2 R31.2 U5.9
N$26: J44.2 J45.VIN0 J46.GND J46.GNDBREAK J47.1 JP21.1
N$29: R41.1 U6.7
N$30: C32.A C33.A C34.1 D12.1 JP23.1 JP24.1 R36.2 R38.2 U6.9
N$31: J52.2 J53.VIN0 J54.GND J54.GNDBREAK J55.1 JP25.1
N$34: R48.1 U7.7
N$35: C38.A C39.A C40.1 D14.1 JP27.1 JP28.1 R43.2 R45.2 U7.9
N$36: J60.2 J61.VIN0 J62.GND J62.GNDBREAK J63.1 JP29.1
N$39: R55.1 U8.7
N$40: C44.A C45.A C46.1 D16.1 JP31.1 JP32.1 R50.2 R52.2 U8.9
N$41: J68.2 J69.VIN0 J70.GND J70.GNDBREAK J71.1 JP33.1
N$44: R62.1 U9.7
N$45: C50.A C51.A C52.1 D18.1 JP35.1 JP36.1 R57.2 R59.2 U9.9
NTC: U1.8
NTC1: U2.8
NTC2: U3.8
NTC3: U4.8
NTC4: U5.8
NTC5: U6.8
NTC6: U7.8
NTC7: U8.8
NTC8: U9.8
SENSE: JP4.2 L1.P$2 R1.1 U1.10
SENSE1: JP7.2 L2.P$2 R8.1 U2.10
SENSE2: JP11.2 L3.P$2 R15.1 U3.10
SENSE3: JP15.2 L4.P$2 R22.1 U4.10
SENSE4: JP19.2 L5.P$2 R29.1 U5.10
SENSE5: JP23.2 L6.P$2 R36.1 U6.10
SENSE6: JP27.2 L7.P$2 R43.1 U7.10
SENSE7: JP31.2 L8.P$2 R50.1 U8.10
SENSE8: JP35.2 L9.P$2 R57.1 U9.10
SET: J4.4 R7.2 U1.2
SET1: J16.4 R14.2 U2.2
SET2: J24.4 R21.2 U3.2
SET3: J32.4 R28.2 U4.2
SET4: J40.4 R35.2 U5.2
SET5: J48.4 R42.2 U6.2
SET6: J56.4 R49.2 U7.2
SET7: J64.4 R56.2 U8.2
SET8: J72.4 R63.2 U9.2
SFSASDF: J2.PWR J7.1 JP2.1
SFSASDF1: J12.1 J14.PWR JP6.1
SFSASDF2: J20.1 J22.PWR JP10.1
SFSASDF3: J28.1 J30.PWR JP14.1
SFSASDF4: J36.1 J38.PWR JP18.1
SFSASDF5: J44.1 J46.PWR JP22.1
SFSASDF6: J52.1 J54.PWR JP26.1
SFSASDF7: J60.1 J62.PWR JP30.1
SFSASDF8: J68.1 J70.PWR JP34.1
SW: C5.2 D1.3 L1.P$1 U1.12
SW1: C11.2 D3.3 L2.P$1 U2.12
SW2: C17.2 D5.3 L3.P$1 U3.12
SW3: C23.2 D7.3 L4.P$1 U4.12
SW4: C29.2 D9.3 L5.P$1 U5.12
SW5: C35.2 D11.3 L6.P$1 U6.12
SW6: C41.2 D13.3 L7.P$1 U7.12
SW7: C47.2 D15.3 L8.P$1 U8.12
SW8: C53.2 D17.3 L9.P$1 U9.12
TIMER: C6.2 U1.6
TIMER1: C12.2 U2.6
TIMER2: C18.2 U3.6
TIMER3: C24.2 U4.6
TIMER4: C30.2 U5.6
TIMER5: C36.2 U6.6
TIMER6: C42.2 U7.6
TIMER7: C48.2 U8.6
TIMER8: C54.2 U9.6
V_BATT: J3.2 J5.1 J6.1 JP3.2 R4.1 R5.1
V_BATT1: J9.2 J10.1 J11.1 JP8.2 R11.1 R12.1
V_BATT2: J17.2 J18.1 J19.1 JP12.2 R18.1 R19.1
V_BATT3: J25.2 J26.1 J27.1 JP16.2 R25.1 R26.1
V_BATT4: J33.2 J34.1 J35.1 JP20.2 R32.1 R33.1
V_BATT5: J41.2 J42.1 J43.1 JP24.2 R39.1 R40.1
V_BATT6: J49.2 J50.1 J51.1 JP28.2 R46.1 R47.1
V_BATT7: J57.2 J58.1 J59.1 JP32.2 R53.1 R54.1
V_BATT8: J65.2 J66.1 J67.1 JP36.2 R60.1 R61.1
VIN: C1.1 JP1.2 JP2.2 R7.1 U1.1 U1.3
VIN1: C7.1 JP5.2 JP6.2 R14.1 U2.1 U2.3
VIN2: C13.1 JP9.2 JP10.2 R21.1 U3.1 U3.3
VIN3: C19.1 JP13.2 JP14.2 R28.1 U4.1 U4.3
VIN4: C25.1 JP17.2 JP18.2 R35.1 U5.1 U5.3
VIN5: C31.1 JP21.2 JP22.2 R42.1 U6.1 U6.3
VIN6: C37.1 JP25.2 JP26.2 R49.1 U7.1 U7.3
VIN7: C43.1 JP29.2 JP30.2 R56.1 U8.1 U8.3
VIN8: C49.1 JP33.2 JP34.2 R63.1 U9.1 U9.3